# EAGLE board blank (EAGLE 6.6.0)

No outline drawn. Coordinates in mm, seen from the top.
Copper layers used: 

## Placement (x,y rotation side)
U$1  [WHATX]  7.62,78.74 0 top

## Library data of the parts
U$1 = Aesthetics